# Altium PCB MainPCB.PcbDoc
Units mil, origin at the board's own origin, x right, y up, seen from the top; angles counter-clockwise.
Board outline 3740.16 x 1377.95 mil, 2 copper layers (Top Layer, Bottom Layer), stack 65.792 mil thick; 17 components, 11 nets, 49 pads, 0 vias.
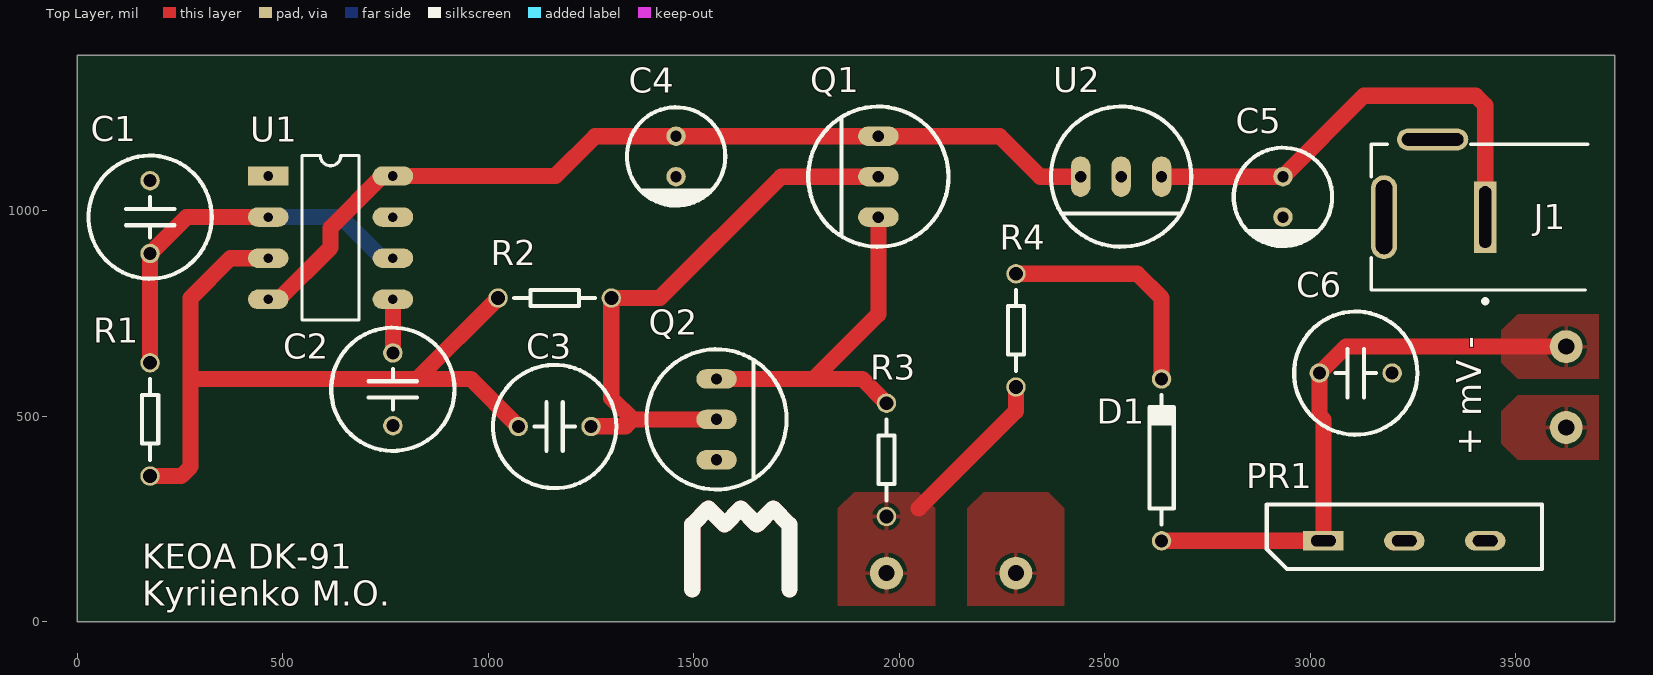
[diagram p0: Top Layer view]
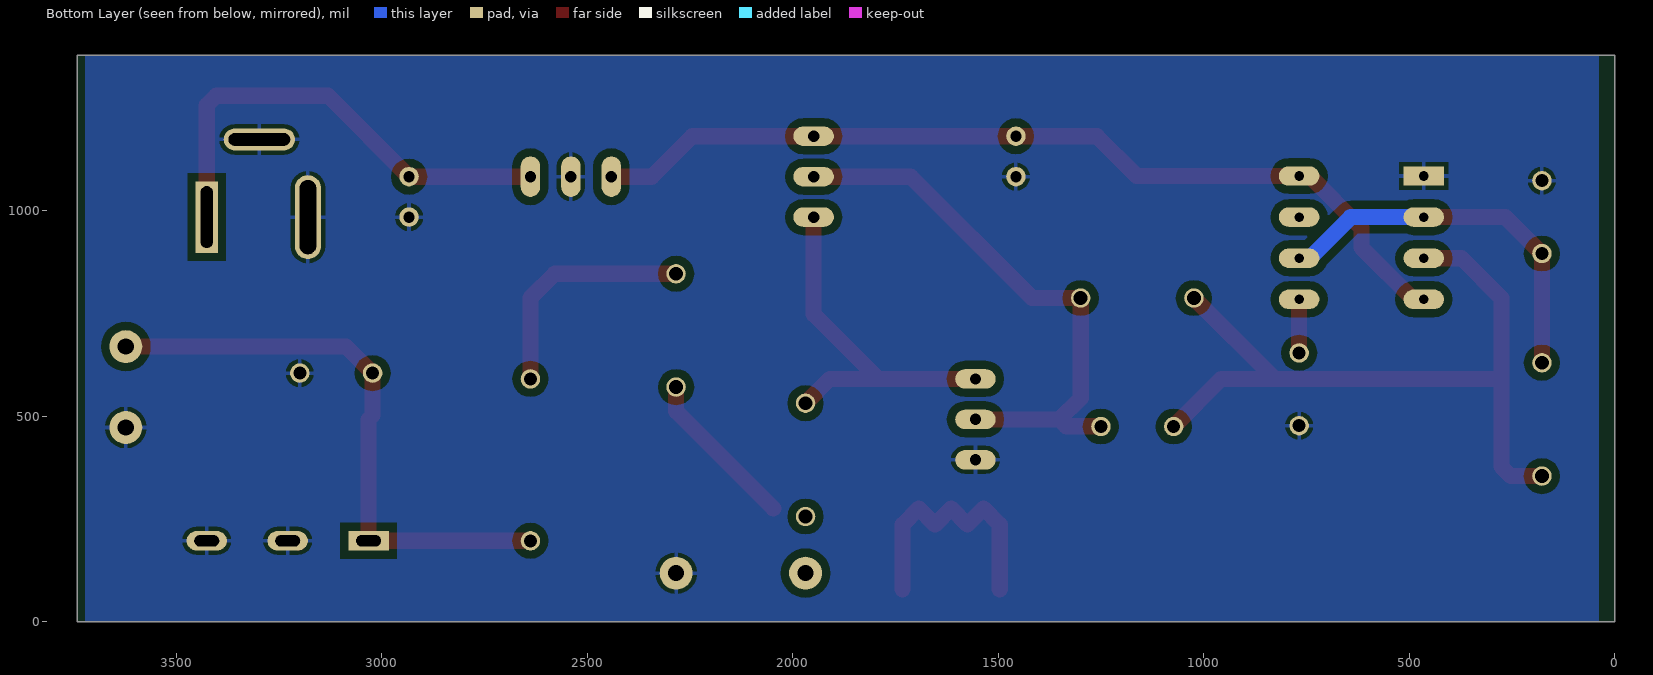
[diagram p1: Bottom Layer view, seen from below]
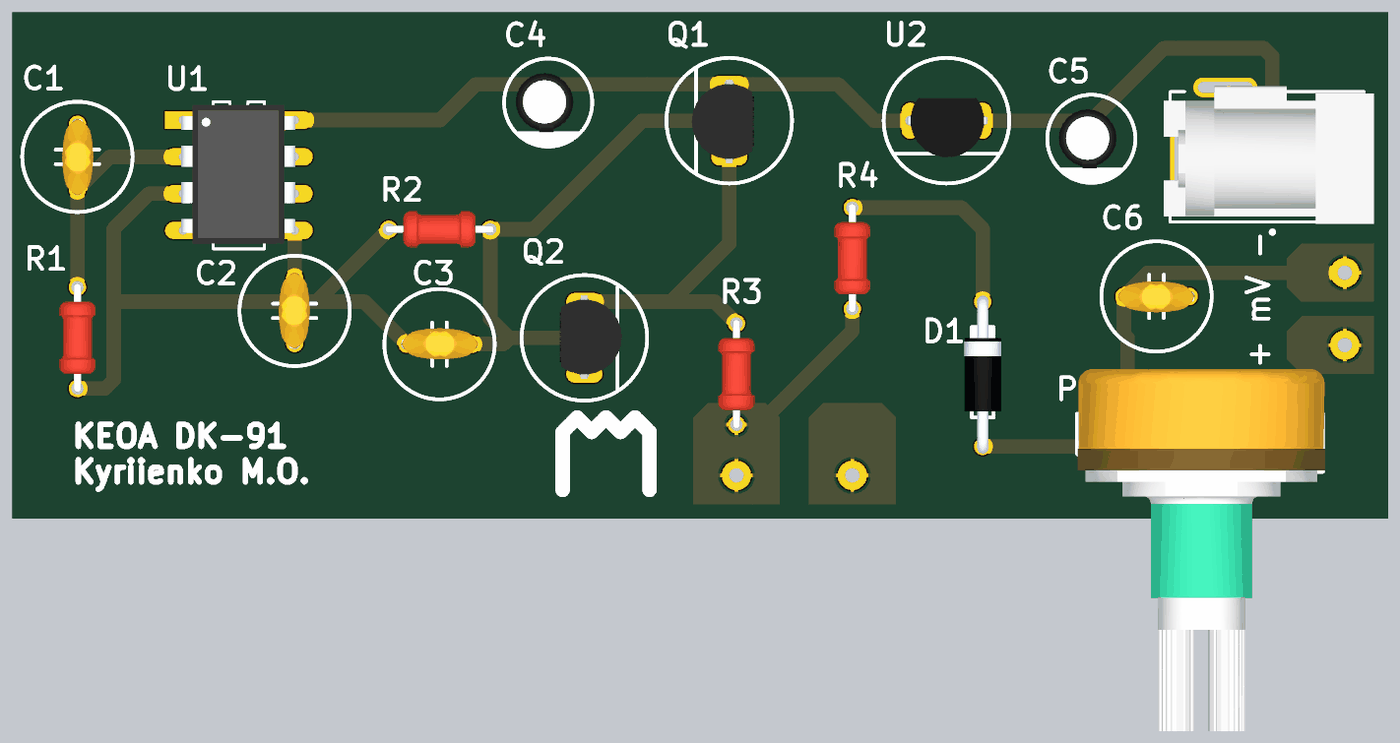
[diagram p2: 3D render of the assembled board from above, using the file's embedded part models]

## Layer stack, top to bottom
Top Solder: solder mask 0.4, Solder Resist, Dk 3.5
Top Layer: signal copper 1.4
Dielectric 1: dielectric 62.9921, FR-4, Dk 4.8
Bottom Layer: signal copper 1.4
Bottom Solder: solder mask 0.4, Solder Resist, Dk 3.5

## Board outline
0,1377.95 0,0 3740.16,0 3740.16,1377.95

## Design rules (kind name [scope] priority, off if disabled: settings)
Clearance [All] p1: gap=19.68 ignorepadtopadclearanceinfootprint=FALSE
PolygonConnect [All] p1: connectstyle=Relief reliefconductorwidth=10 reliefentries=4 polygonreliefangle="90 Angle" airgapwidth=10
RoutingVias [All] p1: holewidth=28 width=50 viastyle="Through Hole" minholewidth=28 minwidth=50 maxholewidth=28 maxwidth=50
SolderMaskExpansion [All] p1: expansion=4 istentingtop=FALSE
Width [All] p1: maxlimit=216.54 minlimit=39.37 preferedwidth=39.37
30 further rules are at their usual default settings.

## Components (designator, comment, footprint, x,y, rotation, side; value= is the part's Value field where it differs from the comment)
C1 "1nF" Ceramica 177.17,984.25 r90 top
C2 "0.01uF" Ceramica 767.72,565.39 r270 top
C3 "1nF" Ceramica 1161.42,474.84 r180 top
C4 "100uF" Electrolytic 1456.69,1131.89 r270 top
C5 "100uF" Electrolytic 2933.07,1033.46 r270 top
C6 "0.68uF" Ceramica 3110.24,604.76 r0 top
D1 "Diode" Diode 2637.8,196.85 r90 top
J1 "Conn_Switchcraft_RAPC722X_eec" Switchcraft_RAPC722X_0 3433.07,984.25 r90 top
PR1 "Pot. 47K" Portentiometr 3021.65,196.85 r0 top
Q1 "npn" TO-92 1948.82,984.25 r180 top
Q2 "pnp" TO-92 1555.12,590.55 r0 top
R1 "10K" RESISTOR 177.17,492.13 r90 top
R2 "4.7K" RESISTOR 1161.42,787.4 r180 top
R3 "300" RESISTOR 1968.5,393.7 r90 top
R4 "8.2K" RESISTOR 2283.46,708.66 r270 top
U1 "timer 555" DIP8 464.57,1084.25 r0 top
U2 "78L05" TO-92 2637.8,1082.68 r270 top

## Footprints (in the part's own frame and the unit in brackets; to place one, negate y for a bottom-side part, rotate by r counter-clockwise, add the part's x,y. Pads: shape width x height; smd on the part's side, far side on the other; paste and mask are expansions set on the pad)
Ceramica [mm]
  round 1.2 hole 0.8: 1(-2.25,0) 2(2.25,0)
  silkscreen extent -3.81,-3.81 3.81,3.8, body extent -2.64,-1.11 2.6,1.06, height 3.46
Diode [mm]
  round 1.2 hole 0.8: A(0,0) K(10,0)
  silkscreen extent 1,-0.75 9,0.75, body extent -0.51,-1.3 10.41,1.27, height 3.06
DIP8 [mm]
  rect 2.5x1.2 hole 0.6: 1(0,0)
  oval 2.5x1.2 hole 0.6: 2(0,-2.54) 3(0,-5.08) 4(0,-7.62) 5(7.7,-7.62) 6(7.7,-5.08) 7(7.7,-2.54) 8(7.7,0)
  silkscreen extent 2.08,-8.89 5.62,1.27, body extent -0.12,-8.54 7.75,1.04, height 5.87
Electrolytic [mm]
  round 1.2 hole 0.7: 1(-1.25,0) 2(1.25,0)
  silkscreen extent -3.04,-3.04 3.04,3.04, body extent -2.05,-2.25 2.05,1.75, height 7.8
Portentiometr [mm]
  rect 2.5x1.2 hole 0.7 slot 1.524 at 0 deg: 1(0.25,0)
  oval 2.5x1.2 hole 0.7 slot 1.524 at 0 deg: 2(5.25,0) 3(10.25,0)
  silkscreen extent -3.25,-1.75 13.75,2.25, body extent -3.19,-19.65 13.91,5.35, height 21.04
RESISTOR [mm]
  round 1.2 hole 0.86: 1(-3.5,0) 2(3.5,0)
  silkscreen extent -2.5,-0.5 2.5,0.5, body extent -3.75,-1.25 3.75,1.25, height 3.3
Switchcraft_RAPC722X_0 [mm]
  rect 4.41x1.36 hole 0.76 slot 3.81 at 0 deg paste-1000 mask+0: 1(0,0.2)
  oval 1.36x4.41 hole 3.81 slot 0.76 at 0 deg paste-1000 mask+0: 2(4.8,3.45)
  oval 5.18x1.62 hole 1.02 slot 4.58 at 0 deg paste-1000 mask+0: 3(0,6.45)
  silkscreen extent -5.32,-6.15 4.5,7.25, body extent -4.63,-6.79 4.88,7.71, height 11.85
TO-92 [mm]
  oval 2.5x1.2 hole 0.7: 1(0,0) 2(0,-2.5) 3(0,-5)
  silkscreen extent -4.33,-6.83 4.33,1.83, body extent -1.71,-5.34 2.59,0.46, height 12.31

## Part data
C1 C3: library part C322C102KFR5TA, "CAP CER 1000PF 1.5KV X7R RADIAL", Case/Package=Radial, Dielectric=X7R, Manufacturer=KEMET, Max Operating Temperature=125°C, Min Operating Temperature=-55°C, Package Quantity=500, Supplier Part Number 1=399-5099-ND, Tolerance=10%, Voltage Rating=1.5kV, Capacitance=1nF, Category="Ceramic Capacitors", ComponentLink1Description=https://datasheet.ciiva.com/160/f3101-goldmax-160936.pdf?src-supplier=Digi-Key, ComponentLink1URL=https://datasheet.ciiva.com/160/f3101-goldmax-160936.pdf?src-supplier=Digi-Key, Construction=RADIAL, Depth=5.08mm, Dissipation Factor=2.5%, Height=3.18mm, Height - Seated (Max)=0.26inch, Lead Diameter=0.51mm, Lead Free="Lead Free", Lead Length=7mm, Lead Pitch=5.08mm, Lead/Base Style="Formed Leads", Length=5.08mm, Manufacturer Part Number=C322C102KFR5TA, Mount="Through Hole", Packaging=Bulk, Pitch=5.08mm, Pricing 1="1=1,43000, 10=1,13200, 50=0,98160, 100=0,84940, 500=0,64176, 1000=0,56625, 2500=0,52850, 5000=0,50962 (USD)", Radiation Hardening=No, REACH SVHC="No SVHC", RoHS=Yes, RoHS Compliant=Yes, Series="Golden Max™", Stock 1=4516, Supplier 1=Digi-Key, Termination=Radial, Voltage Rating (DC)=1.5kV, Width=5.08mm
C2: library part K103K15X7RH53L2, "Cap Ceramic 0.01uF 100V X7R 10% Radial 2.5mm 125C Bulk", Capacitance=10nF, Case/Package=Dipped, Dielectric=X7R, Manufacturer="Vishay BCcomponents", Max Operating Temperature=125°C, Min Operating Temperature=-55°C, Package Quantity=5000, Supplier Part Number 1=BC5135-ND, Tolerance=10%, Voltage Rating=100V, Category="Ceramic Capacitors", ComponentLink1Description=https://datasheet.ciiva.com/5390/mkseries-205465-5390133.pdf?src-supplier=Mouser, ComponentLink1URL=https://datasheet.ciiva.com/5390/mkseries-205465-5390133.pdf?src-supplier=Mouser, ComponentLink2Description=https://datasheet.ciiva.com/7657/526146-7657413.pdf?src-supplier=Element14, ComponentLink2URL=https://datasheet.ciiva.com/7657/526146-7657413.pdf?src-supplier=Element14, ComponentLink3Description=https://datasheet.ciiva.com/16458/kseries-16458794.pdf?src-supplier=Future+Electronics, ComponentLink3URL=https://datasheet.ciiva.com/16458/kseries-16458794.pdf?src-supplier=Future+Electronics, ComponentLink4Description=https://datasheet.ciiva.com/181/49363-vmn-pt9161-181198.pdf?src-supplier=Digi-Key, ComponentLink4URL=https://datasheet.ciiva.com/181/49363-vmn-pt9161-181198.pdf?src-supplier=Digi-Key, Construction=RADIAL, Depth=2.6mm, Diameter=500um, Height=4mm, Height - Seated (Max)=0.062inch, Lead Diameter=0.5mm, Lead Free="Lead Free", Lead Length=30mm, Lead Pitch=2.5mm, Lead/Base Style=Straight, Length=4mm, Manufacturer Part Number=K103K15X7RH53L2, Mount="Through Hole", Packaging=Bulk, Pricing 1="1=0,28000, 10=0,19300, 50=0,12840, 100=0,10920, 500=0,07708, 1000=0,06745, 2500=0,06424, 5000=0,05942 (USD)", Radiation Hardening=No, REACH SVHC=Unknown, RoHS=Yes, RoHS Compliant=Yes, Series="Mono-Kap™ K", Stock 1=17755, Supplier 1=Digi-Key, Termination=Radial, Thickness=2.6mm, Voltage Rating (DC)=100V, Weight=0.005644oz, Width=2.5mm
C4 C5: library part UPJ1C101MED1TD, "Cap Aluminum Lytic 100uF 16V 20% (6.3 X 11mm) Radial 2.5mm 175mA 2000h 105C Ammo Pack", Case/Package=Radial, Manufacturer=Nichicon, Max Operating Temperature=105°C, Min Operating Temperature=-55°C, Package Quantity=2000, Ripple Current=175mA, Supplier Part Number 1=493-5010-1-ND, Tolerance=20%, Voltage Rating=16V, Capacitance=100uF, Category="Aluminum Electrolytic Capacitors", ComponentLink1Description=https://datasheet.ciiva.com/6298/e-pj-6298311.pdf?src-supplier=Digi-Key, ComponentLink1URL=https://datasheet.ciiva.com/6298/e-pj-6298311.pdf?src-supplier=Digi-Key, Diameter=10mm, Height - Seated (Max)=0.472inch, Impedance=550mR, Lead Diameter=0.5mm, Lead Pitch=0.098inch, Length=16mm, Life (Hours)=2000Hour, Manufacturer Part Number=UPJ1C101MED1TD, Mount="Through Hole", Packaging="Tape and Reel", Pricing 1="1=0,38000, 10=0,26300, 50=0,18440, 100=0,15800, 500=0,11850, 1000=0,10007 (USD)", RoHS=Yes, RoHS Compliant=Yes, Series=PJ, Stock 1=5068, Supplier 1=Digi-Key, Termination=Radial, Voltage Rating (DC)=16V
C6: library part FA24X7R1H684KRU00, "Capacitor Ceramic 0.68uF 50V X7R 10% 5mm Bulk", Manufacturer=TDK, Supplier Part Number 1=445-181142-ND, Category="Ceramic Capacitors", Manufacturer Part Number=FA24X7R1H684KRU00, Pricing 1="1=0,58000, 10=0,40800, 50=0,30860, 100=0,26880, 500=0,19910, 1000=0,16924, 2500=0,15928, 5000=0,14932 (USD)", RoHS=Yes, RoHS Compliant=Yes, Stock 1=1988, Supplier 1=Digi-Key
D1: library part 1N4148, "Diode Ultra Fast Recovery Rectifier 100 Volt 0.3A 2-Pin DO-3", Average Rectified Current=200mA, Capacitance=4pF, Case/Package=DO-35, Current=4A, Forward Current=300mA, Forward Voltage=1V, Manufacturer="ON Semiconductor / Fairchild", Max Forward Surge Current (Ifsm)=1A, Max Operating Temperature=175°C, Max Power Dissipation=500mW, Max Repetitive Reverse Voltage (Vrrm)=100V, Max Reverse Current=5uA, Min Operating Temperature=-65°C, Package Quantity=2000, Supplier Part Number 1=1N4148FS-ND, Category="Integrated Circuits (ICs)", ComponentLink1Description=https://datasheet.ciiva.com/27049/743285-27049708.pdf?src-supplier=Jameco, ComponentLink1URL=https://datasheet.ciiva.com/27049/743285-27049708.pdf?src-supplier=Jameco, ComponentLink2Description=https://datasheet.ciiva.com/1242/1716967-1242233.pdf?src-supplier=Newark, ComponentLink2URL=https://datasheet.ciiva.com/1242/1716967-1242233.pdf?src-supplier=Newark, ComponentLink3Description=https://datasheet.ciiva.com/910/1n914-910546.pdf?src-supplier=Digi-Key, ComponentLink3URL=https://datasheet.ciiva.com/910/1n914-910546.pdf?src-supplier=Digi-Key, ComponentLink4Description=https://datasheet.ciiva.com/3304/fdll914b-3304217.pdf?src-supplier=Avnet, ComponentLink4URL=https://datasheet.ciiva.com/3304/fdll914b-3304217.pdf?src-supplier=Avnet, ComponentLink5Description=https://datasheet.ciiva.com/25951/fdll914b-25951516.pdf?src-supplier=Avnet+Europe, ComponentLink5URL=https://datasheet.ciiva.com/25951/fdll914b-25951516.pdf?src-supplier=Avnet+Europe, Contact Plating=Tin,Matte, Current Rating=200mA, Diameter=1.91mm, Element Configuration=Single, Height=4.56mm, Lead Free="Lead Free", Length=4.56mm, Manufacturer Part Number=1N4148, Max Reverse Voltage (DC)=100V, Max Surge Current=4A, Mount="Through Hole", Number of Pins=2, Output Current=200mA, Outside Diameter=1.85mm, Packaging=Bulk, Peak Non-Repetitive Surge Current=4A, Polarity=Standard, Power Dissipation=500mW, Pricing 1="1=0,10000, 10=0,07100, 100=0,03870, 500=0,02378, 1000=0,01622, 2000=0,01379, 5000=0,01243, 10000=0,01081, 50000=0,00893 (USD)", Radiation Hardening=No, REACH SVHC="No SVHC", Recovery Time=4ns, Reverse Recovery Time=4ns, Reverse Voltage=100V, RoHS=Yes, Series=-, Stock 1=430087, Supplier 1=Digi-Key, Voltage=100V, Voltage Rating (DC)=100V, Weight=0.01lb, Width=1.91mm
J1: "CONN PWR JACK 2X5.5MM SOLDER", color=Black, current_rating="5 A", Digikey Part Number=SC1313-ND, Manufacturer=Switchcraft, Mouser Part Number=502-RAPC722X, Octopart Part Number=da391331d91005fe, Package=cCONN_PTH_DC_JACK_14MM5_9MM0, Part Number=RAPC722X, Temperature=to, voltage_rating_ac="250 V", Category 001Fcd153521Dbd8="Jack Plugs/Sockets", Category 75Fab8F04590Ae3D="Connectors and Adapters", Category 0836C53C3D42D3F1=Connectors, Category A3C16Ecb93907806=Uncategorized, Category Bda670Ac885E6661=Uncategorized, ComponentLink1Description=Upverter, ComponentLink1URL=https://upverter.com/upn/revision/3390e98938df1595/, ComponentLink2Description=Datasheet, ComponentLink2URL=https://upverter.com/datasheet/96e949921d5d9c87f4f03f75a44e5e613c467149.pdf, Digikey Description="CONN PWR JACK 2X5.5MM SOLDER", gender=Female, helpURL=https://upverter.com/upn/revision/3390e98938df1595/, Lead Free=yes, Mounting Type="through hole", mounting_angle="90 °", Num Pins=3, number_of_contacts=2, Price=0.740243901321, RoHS=TRUE, Supplier 1=Digi-Key, Supplier 2=Mouser, Supplier Part Number 1=SC1313-ND, Supplier Part Number 2=502-RAPC722X
PR1: library part 23ESA473KMF16N, "Potentiometers 23E 47KA 10% 6.35X16FL B8", Manufacturer="TE Connectivity", Max Operating Temperature=70°C, Max Power Dissipation=400mW, Min Operating Temperature=-25°C, Package Quantity=200, Resistance=47kR, Resistance Tolerance=10%, Resistor Type=Carbon, Supplier Part Number 1=95W9495, Voltage Rating=500V, Category="Variable Resistors and Potentiometers", ComponentLink1Description=https://datasheet.ciiva.com/12918/ng-ds-1773115-e-199807-12918317.pdf?src-supplier=Mouser, ComponentLink1URL=https://datasheet.ciiva.com/12918/ng-ds-1773115-e-199807-12918317.pdf?src-supplier=Mouser, ComponentLink2Description=https://datasheet.ciiva.com/22658/1468316-22658904.pdf?src-supplier=Element14, ComponentLink2URL=https://datasheet.ciiva.com/22658/1468316-22658904.pdf?src-supplier=Element14, ELV=Compliant, Length=26.7mm, Manufacturer Part Number=23ESA473KMF16N, Mount=Panel, Number of Gangs=1, Number of Turns=1, Packaging=Bulk, Power Rating=400mW, Pricing 1="1=0,80700, 10=0,80700, 25=0,80700, 50=0,80700, 100=0,80700, 250=0,80700 (USD)", REACH SVHC="No SVHC", RoHS=Yes, RoHS Compliant=Yes, Sealable="No (Without)", Series="23, Citec", Stock 1=3, Supplier 1=Newark, Taper=Linear, Termination=Eyelet, Tolerance=10%, Type=Potentiometer, Voltage Rating (DC)=500V
Q1: library part BC547B, "ON SEMICONDUCTOR - BC547B - Bipolar (BJT) Single Transistor, General Purpose, NPN, 45 V, 300 MHz, 500 mW, 100 mA, 110 hFE", Case/Package=TO-92, Collector Base Voltage (VCBO)=50V, Collector Emitter Breakdown Voltage=45V, Collector Emitter Saturation Voltage=300mV, Current Rating=100mA, Emitter Base Voltage (VEBO)=6V, Frequency=300MHz, Manufacturer="ON Semiconductor / Fairchild", Max Operating Temperature=150°C, Max Power Dissipation=500mW, Min Operating Temperature=-65°C, Package Quantity=2000, Supplier Part Number 1=67K3328, Voltage=40V, Category=BJTs, Collector Emitter Voltage (VCEO)=45V, ComponentLink1Description=https://datasheet.ciiva.com/17011/bc547-17011404.pdf?src-supplier=Future+Electronics, ComponentLink1URL=https://datasheet.ciiva.com/17011/bc547-17011404.pdf?src-supplier=Future+Electronics, ComponentLink2Description=https://datasheet.ciiva.com/985/bc546-547-548rev5-985523.pdf?src-supplier=Digi-Key, ComponentLink2URL=https://datasheet.ciiva.com/985/bc546-547-548rev5-985523.pdf?src-supplier=Digi-Key, ComponentLink3Description=https://datasheet.ciiva.com/972/bc546-972262.pdf?src-supplier=Digi-Key, ComponentLink3URL=https://datasheet.ciiva.com/972/bc546-972262.pdf?src-supplier=Digi-Key, ComponentLink4Description=https://datasheet.ciiva.com/1195/1868820-1195464.pdf?src-supplier=Element14, ComponentLink4URL=https://datasheet.ciiva.com/1195/1868820-1195464.pdf?src-supplier=Element14, ComponentLink5Description=https://datasheet.ciiva.com/25996/bc550-25996616.pdf?src-supplier=Avnet+Europe, ComponentLink5URL=https://datasheet.ciiva.com/25996/bc550-25996616.pdf?src-supplier=Avnet+Europe, ComponentLink6Description=https://datasheet.ciiva.com/11197/bc550-11197769.pdf?src-supplier=Avnet, ComponentLink6URL=https://datasheet.ciiva.com/11197/bc550-11197769.pdf?src-supplier=Avnet, ComponentLink7Description=https://datasheet.ciiva.com/16472/bc550-16472201.pdf?src-supplier=Avnet+Asia, ComponentLink7URL=https://datasheet.ciiva.com/16472/bc550-16472201.pdf?src-supplier=Avnet+Asia, Contact Plating=Copper,Tin,Silver, Element Configuration=Single, Gain Bandwidth Product=100MHz, Height=4.58mm, hFE Min=200, Lead Free="Lead Free", Length=4.58mm, Manufacturer Part Number=BC547B, Max Breakdown Voltage=45V, Max Collector Current=100mA, Max Frequency=300MHz, Mount="Through Hole", Number of Elements=1, Number of Pins=3, Packaging=Bulk, Polarity=NPN, Power Dissipation=500mW, Pricing 1="1=0,43300, 10=0,30500, 100=0,15600, 500=0,12700, 1000=0,09600, 2500=0,08100 (USD)", Radiation Hardening=No, REACH SVHC="No SVHC", RoHS=Yes, Stock 1=1781, Supplier 1=Newark, Transition Frequency=300MHz, Voltage Rating (DC)=45V, Weight=0.007055oz, Width=3.86mm
Q2: library part KSA539YTA, "TRANS PNP 45V 0.2A TO-92", Case/Package=TO-92-3, Collector Base Voltage (VCBO)=-60V, Collector Emitter Breakdown Voltage=45V, Collector Emitter Saturation Voltage=-250mV, Current Rating=-200mA, Emitter Base Voltage (VEBO)=-5V, Manufacturer="ON Semiconductor / Fairchild", Max Collector Current=200mA, Max Operating Temperature=150°C, Max Power Dissipation=400mW, Min Operating Temperature=-55°C, Package Quantity=2000, Supplier Part Number 1=512-KSA539YTA, Voltage Rating (DC)=-45V, Category=BJTs, Collector Emitter Voltage (VCEO)=45V, ComponentLink1Description=https://datasheet.ciiva.com/4724/ksa539-88760-4724359.pdf?src-supplier=Mouser, ComponentLink1URL=https://datasheet.ciiva.com/4724/ksa539-88760-4724359.pdf?src-supplier=Mouser, ComponentLink2Description=https://datasheet.ciiva.com/982/ksa539-982951.pdf?src-supplier=Digi-Key, ComponentLink2URL=https://datasheet.ciiva.com/982/ksa539-982951.pdf?src-supplier=Digi-Key, Element Configuration=Single, hFE Min=40, Lead Free="Lead Free", Manufacturer Part Number=KSA539YTA, Mount="Through Hole", Number of Elements=1, Number of Pins=3, Packaging="Ammo Pack", Polarity=PNP, Power Dissipation=400mW, Radiation Hardening=No, RoHS=Yes, Supplier 1=Mouser, Weight=0.1782g
R1: library part CFR100J10K, "Carbon Film Resistors - Through Hole 10KOhm 1W 500PPM", Case/Package=Axial, Manufacturer="TE Connectivity", Max Operating Temperature=155°C, Max Power Dissipation=1W, Min Operating Temperature=-55°C, Number of Resistors=1, Resistance=10kR, Resistance Tolerance=5%, Resistor Type="Thin Film", Supplier Part Number 1=A105978CT-ND, Temperature Coefficient=0ppm/°C, Voltage Rating=500V, Category="Through-Hole Resistors", ComponentLink1Description=https://datasheet.ciiva.com/11826/0900766b80098b49-11826112.pdf?src-supplier=RSComponents, ComponentLink1URL=https://datasheet.ciiva.com/11826/0900766b80098b49-11826112.pdf?src-supplier=RSComponents, ComponentLink2Description=https://datasheet.ciiva.com/24355/eng-ds-1773195-d-24355942.pdf?src-supplier=Onlinecomponents.com, ComponentLink2URL=https://datasheet.ciiva.com/24355/eng-ds-1773195-d-24355942.pdf?src-supplier=Onlinecomponents.com, ComponentLink3Description=https://datasheet.ciiva.com/16760/70063023-16760748.pdf?src-supplier=Allied+Electronics, ComponentLink3URL=https://datasheet.ciiva.com/16760/70063023-16760748.pdf?src-supplier=Allied+Electronics, ComponentLink4Description=https://datasheet.ciiva.com/22664/1723854-22664894.pdf?src-supplier=Element14, ComponentLink4URL=https://datasheet.ciiva.com/22664/1723854-22664894.pdf?src-supplier=Element14, Diameter=5mm, ELV=Compliant, Length=12mm, Manufacturer Part Number=CFR100J10K, Mount=Axial, Number of Terminations=2, Packaging="Cut Tape", Power Rating=1W, Pricing 1="1=0,29000, 10=0,24100, 25=0,17560, 50=0,12740, 100=0,09440, 250=0,07244, 500=0,05708 (USD)", REACH SVHC="No SVHC", RoHS=Yes, RoHS Compliant=Yes, Series="CFR100, Neohm", Stock 1=792, Supplier 1=Digi-Key, Technology="CARBON FILM", Termination=Axial, Tolerance=5%, Voltage Rating (DC)=500V
R2: library part CFS1/4CT52R472J, "Res Carbon Film 4.7K Ohm 5% 0.25W(1/4W) -450ppm/C to 350ppm/C Conformal Coated AXL T/R", Case/Package=Conformal, Manufacturer="KOA Speer", Max Operating Temperature=155°C, Min Operating Temperature=-55°C, Package Quantity=5000, Power Rating=250mW, Resistance=4.7kR, Resistor Type="Carbon Film", Supplier Part Number 1=2019-CFS1/4CT52R472JCT-ND, Temperature Coefficient=350ppm/°C, Tolerance=5%, Voltage Rating=250V, Category="Through-Hole Resistors", ComponentLink1Description=https://datasheet.ciiva.com/5478/cf-5478494.pdf?src-supplier=Mouser, ComponentLink1URL=https://datasheet.ciiva.com/5478/cf-5478494.pdf?src-supplier=Mouser, Construction=Cylindrical, Length=3.2mm, Manufacturer Part Number=CFS1/4CT52R472J, Military Standard=Not, Mount="Through Hole", Packaging="Tape and Reel", Pricing 1="1=0,10000, 10=0,04600, 25=0,03360, 50=0,02560, 100=0,01890, 250=0,01440, 500=0,01152, 1000=0,00848 (USD)", RoHS=Yes, Series=CF, Stock 1=3871, Supplier 1=Digi-Key, Termination=Axial
R3: library part RSF100JB-73-300R, "RES 300 OHM 1W 5% AXIAL", Case/Package=Axial, Manufacturer=Yageo, Max Operating Temperature=235°C, Max Power Dissipation=1W, Min Operating Temperature=-55°C, Package Quantity=100, Resistance=300R, Resistor Type="Metal Oxide", Supplier Part Number 1=300W-1-ND, Tolerance=5%, Category="Through-Hole Resistors", ComponentLink1Description=https://datasheet.ciiva.com/2714/yageolr-rsf-2013-2714971.pdf?src-supplier=Digi-Key, ComponentLink1URL=https://datasheet.ciiva.com/2714/yageolr-rsf-2013-2714971.pdf?src-supplier=Digi-Key, Features="Flame Retardant Coating", Length=0.453inch, Manufacturer Part Number=RSF100JB-73-300R, Number of Terminations=2, Packaging=Bulk, Pricing 1="1=0,31000, 10=0,26500, 25=0,19240, 50=0,13940, 100=0,10340, 250=0,07936, 500=0,06252, 1000=0,04329, 5000=0,03608 (USD)", RoHS=Yes, Stock 1=1681, Supplier 1=Digi-Key
R4: library part CF14JA8K20, "RES 8.2K OHM 1/4W 5% AXIAL", Case/Package=Axial, Manufacturer="Stackpole Electronics", Max Operating Temperature=155°C, Max Power Dissipation=250mW, Min Operating Temperature=-55°C, Package Quantity=5000, Resistance=8.2kR, Resistor Type="Carbon Film", Temperature Coefficient=-400ppm/°C, Tolerance=5%, Category="Through-Hole Resistors", ComponentLink1Description=https://www.seielect.com/Catalog/SEI-CF_CFM.pdf?src-supplier=Digi-Key, ComponentLink1URL=https://www.seielect.com/Catalog/SEI-CF_CFM.pdf?src-supplier=Digi-Key, ComponentLink2Description=https://www.seielect.com/catalog/SEI-CF_CFM.pdf?src-supplier=Avnet, ComponentLink2URL=https://www.seielect.com/catalog/SEI-CF_CFM.pdf?src-supplier=Avnet, Contact Plating=Tin,Matte, Diameter=2.3mm, Features="Flame Retardant Coating", Length=0.256inch, Manufacturer Part Number=CF14JA8K20, Mount="Through Hole,Axial", Number of Terminations=2, Packaging="Tape and Reel", Pricing 1="5000=0,00469, 10000=0,00462, 20000=0,00449, 30000=0,00439, 40000=0,00422, 50000=0,00413, 500000=0,00403 (USD)", Radiation Hardening=No, RoHS=Yes, RoHS Compliant=Yes, Series=CF, Supplier 1=Avnet, Supplier Part Number 1=CF14JA8K20
U1: library part NE555P, "Standard Timer Single 8-Pin PDIP Tube", Case/Package=PDIP, Current Rating=10mA, Frequency=500kHz, High Level Output Current=-200mA, Low Level Output Current=200mA, Manufacturer="Texas Instruments", Max Operating Temperature=70°C, Max Supply Voltage=16V, Min Operating Temperature=0°C, Min Supply Voltage=4.5V, Nominal Supply Current=2mA, Operating Supply Voltage=5V, Package Quantity=50, Quiescent Current=15mA, Supplier Part Number 1=595-NE555P, Category="Clock and Timing", ComponentLink1Description=https://datasheet.ciiva.com/1139/sa555-1139904.pdf?src-supplier=Element14, ComponentLink1URL=https://datasheet.ciiva.com/1139/sa555-1139904.pdf?src-supplier=Element14, ComponentLink2Description=https://datasheet.ciiva.com/19457/904085-19457361.pdf?src-supplier=Jameco, ComponentLink2URL=https://datasheet.ciiva.com/19457/904085-19457361.pdf?src-supplier=Jameco, ComponentLink3Description=https://datasheet.ciiva.com/26325/152184-da-01-en-ne555p-timer-tid-26325915.pdf?src-supplier=Conrad, ComponentLink3URL=https://datasheet.ciiva.com/26325/152184-da-01-en-ne555p-timer-tid-26325915.pdf?src-supplier=Conrad, ComponentLink4Description=https://datasheet.ciiva.com/1147/1764032-1147750.pdf?src-supplier=Newark, ComponentLink4URL=https://datasheet.ciiva.com/1147/1764032-1147750.pdf?src-supplier=Newark, ComponentLink5Description=https://datasheet.ciiva.com/14094/ne555-series-eng-tds-14094950.pdf?src-supplier=Distrelec, ComponentLink5URL=https://datasheet.ciiva.com/14094/ne555-series-eng-tds-14094950.pdf?src-supplier=Distrelec, ComponentLink6Description=https://datasheet.ciiva.com/14274/ne555-14274456.pdf?src-supplier=Avnet, ComponentLink6URL=https://datasheet.ciiva.com/14274/ne555-14274456.pdf?src-supplier=Avnet, ComponentLink7Description=https://datasheet.ciiva.com/15152/getdatasheetpartid-248510-15152620.pdf?src-supplier=Verical, ComponentLink7URL=https://datasheet.ciiva.com/15152/getdatasheetpartid-248510-15152620.pdf?src-supplier=Verical, ComponentLink8Description=https://datasheet.ciiva.com/1233/ne555-1233454.pdf?src-supplier=Digi-Key, ComponentLink8URL=https://datasheet.ciiva.com/1233/ne555-1233454.pdf?src-supplier=Digi-Key, ComponentLink9Description=https://datasheet.ciiva.com/26228/ne555-26228892.pdf?src-supplier=Avnet+Europe, ComponentLink9URL=https://datasheet.ciiva.com/26228/ne555-26228892.pdf?src-supplier=Avnet+Europe, Contact Plating=Gold, Height=4.57mm, Lead Free="Lead Free", Length=9.81mm, Manufacturer Part Number=NE555P, Mount="Through Hole", Number of Pins=8, Number of Timers/Counters=1, Operating Supply Current=10mA, Packaging=Rail/Tube, Pricing 1="1=0,41000, 10=0,32900, 50=0,32900, 100=0,32900, 1000=0,32900, 10000=0,32900 (USD)", Radiation Hardening=No, REACH SVHC="No SVHC", RoHS=Yes, RoHS Compliant=Yes, Stock 1=16580, Supplier 1=Mouser, Weight=0.015535oz, Width=6.35mm
U2: library part L78L05ACZ, "Standard Regulator Pos 5V 0.1A 3-Pin TO-92 Bag", Case/Package=TO-92, Dropout Voltage=1.7V, Manufacturer=STMicroelectronics, Max Input Voltage=30V, Max Operating Temperature=125°C, Max Output Current=100mA, Min Input Voltage=7V, Min Operating Temperature=0°C, Min Output Voltage=5V, Output Voltage Accuracy=4%, Package Quantity=2500, Power Supply Rejection Ratio (PSRR)=49dB, Quiescent Current=6mA, Supplier Part Number 1=497-2952-ND, Tolerance=10%, Accuracy=5%, Category="Voltage Regulators - Linear", ComponentLink1Description=https://datasheet.ciiva.com/15110/getdatasheetpartid-34813-15110912.pdf?src-supplier=Verical, ComponentLink1URL=https://datasheet.ciiva.com/15110/getdatasheetpartid-34813-15110912.pdf?src-supplier=Verical, ComponentLink2Description=https://datasheet.ciiva.com/26347/47-3278e-26347723.pdf?src-supplier=Rapid+Electronics, ComponentLink2URL=https://datasheet.ciiva.com/26347/47-3278e-26347723.pdf?src-supplier=Rapid+Electronics, ComponentLink3Description=https://datasheet.ciiva.com/19480/889428-19480893.pdf?src-supplier=Jameco, ComponentLink3URL=https://datasheet.ciiva.com/19480/889428-19480893.pdf?src-supplier=Jameco, ComponentLink4Description=https://datasheet.ciiva.com/26904/l78l05acz-26904499.pdf?src-supplier=IIIC, ComponentLink4URL=https://datasheet.ciiva.com/26904/l78l05acz-26904499.pdf?src-supplier=IIIC, ComponentLink5Description=https://datasheet.ciiva.com/29156/156059-da-01-en-spannungsregler-l78l05acz-to92-stm-29156936.pdf?src-supplier=Conrad, ComponentLink5URL=https://datasheet.ciiva.com/29156/156059-da-01-en-spannungsregler-l78l05acz-to92-stm-29156936.pdf?src-supplier=Conrad, ComponentLink6Description=https://datasheet.ciiva.com/1511/1868798-1511941.pdf?src-supplier=Element14, ComponentLink6URL=https://datasheet.ciiva.com/1511/1868798-1511941.pdf?src-supplier=Element14, ComponentLink7Description=https://datasheet.ciiva.com/3223/cd00000446-3223430.pdf?src-supplier=Avnet, ComponentLink7URL=https://datasheet.ciiva.com/3223/cd00000446-3223430.pdf?src-supplier=Avnet, ComponentLink8Description=https://datasheet.ciiva.com/29570/cd00000446-29570390.pdf?src-supplier=Digi-Key, ComponentLink8URL=https://datasheet.ciiva.com/29570/cd00000446-29570390.pdf?src-supplier=Digi-Key, ComponentLink9Description=https://datasheet.ciiva.com/4882/cd00000446-355303-4882380.pdf?src-supplier=Mouser, ComponentLink9URL=https://datasheet.ciiva.com/4882/cd00000446-355303-4882380.pdf?src-supplier=Mouser, ComponentLink10Description=https://datasheet.ciiva.com/18404/70013906-18404044.pdf?src-supplier=Allied+Electronics, ComponentLink10URL=https://datasheet.ciiva.com/18404/70013906-18404044.pdf?src-supplier=Allied+Electronics, ComponentLink11Description=https://datasheet.ciiva.com/14111/szl78l-data-en-14111405.pdf?src-supplier=Distrelec, ComponentLink11URL=https://datasheet.ciiva.com/14111/szl78l-data-en-14111405.pdf?src-supplier=Distrelec, Contact Plating=Tin,Matte, Height=4.95mm, Lead Free="Lead Free", Length=4.95mm, Manufacturer Part Number=L78L05ACZ, Mount="Through Hole", Nominal Output Voltage=5V, Number of Outputs=1, Number of Pins=3, Number of Regulators=1, Output Configuration=Positive, Output Current=100mA, Output Type=Fixed,Adjustable, Output Voltage=5V, Packaging=Bag, Polarity=Positive, Pricing 1="1=0,50000, 10=0,40900, 25=0,37360, 100=0,27810, 250=0,25208, 500=0,20860, 1000=0,15646, 2500=0,14350 (USD)", Radiation Hardening=No, REACH SVHC="No SVHC", RoHS=Yes, RoHS Compliant=Yes, Series=-, Stock 1=7, Supplier 1=Digi-Key, Weight=0.016oz, Width=3.94mm

## Free pads (board coordinates)
  round 80 hole 39.37: 2(1968.5,118.11) 5(2283.46,118.11) 6(3622.05,669.29) 7(3622.05,472.44)

## Nets (pads, with @x,y where several pads share a name; then routed paths per layer and width w, separated by ;. In a path a pad name is that pad's centre, name@x,y a point inside that pad or via, vN(x,y) a via of type N, cw(c..) or ccw(c..) an arc to the next point about the centre after c; other vN are vias at no path point)
GND: C1.2 C2.2 C4.2 C5.2 C6.2 J1.2 J1.3 pad.5 pad.7 PR1.2 PR1.3 Q2.3 U1.1 U2.2 | length 5.1
  Top Layer w39.37: PR1.2@3201.25,193.21 PR1.2@3204.89,196.85
NetC1_1: C1.1 R1.2 U1.2 U1.6 | length 934.4
  Top Layer w39.37: R1.2 C1.1 265.75,984.25 U1.2
  Bottom Layer w39.37: U1.2 642.13,984.25 742.13,884.25 U1.6
NetC2_1: C2.1 U1.5 | length 130.3
  Top Layer w39.37: C2.1 U1.5
NetC3_1: C3.1 Q1.2 Q2.2 R2.1 | length 1401
  Top Layer w39.37: C3.1 1250.61,475.45 1334.4,475.45 1351.08,492.13 ; Q2.2 1351.08,492.13 ; Q1.2 1712.6,1082.68 1417.32,787.4 R2.1 1299.21,543.99 1351.08,492.13
NetC3_2: C3.2 R1.1 R2.2 U1.3 | length 1870.6
  Top Layer w39.37: R1.1 252.53,354.33 275.59,377.39 275.59,590.55 ; U1.3 372.44,884.25 275.59,787.4 275.59,590.55 ; R2.2 826.77,590.55 ; C3.2 957.12,590.55 826.77,590.55 ; 275.59,590.55 826.77,590.55
NetC4_1: C4.1 Q1.3 U1.4 U1.8 U2.3 | length 2209.7
  Top Layer w39.37: U1.4 490.16,784.25 616.14,910.24 616.14,958.27 742.13,1084.25 U1.8 1162.99,1084.25 1259.84,1181.1 C4.1 Q1.3 2244.09,1181.1 2342.52,1082.68 U2.3
NetC6_1: C6.1 D1.A pad.6 PR1.1 | length 1432.8
  Top Layer w39.37: D1.A PR1.1 3031.5,492.13 3021.65,501.97 C6.1 3086.19,669.29 pad.6
NetD1_2: D1.K R4.1 | length 575.6
  Top Layer w39.37: R4.1 2578.74,846.46 2637.8,787.4 D1.K
NetQ1_1: Q1.1 Q2.1 R3.2 | length 896.8
  Top Layer w39.37: Q2.1 1791.34,590.55 ; Q1.1 1948.82,748.03 1791.34,590.55 ; R3.2 1909.45,590.55 1791.34,590.55
NetR3_1: pad.2 R3.1 R4.2 | length 393.1
  Top Layer w39.37: 2047.24,275.59 2283.46,511.81 R4.2
VCC: C5.1 J1.1 U2.1 | length 1150.7
  Top Layer w39.37: U2.1 C5.1 3129.92,1279.53 3402.13,1279.53 3425.2,1256.47 J1.1
pads on no net: U1.7
copper on no net: | length 649
  Top Layer w39.37: 1496.06,78.74 1496.06,236.22 1535.43,275.59 1574.8,236.22 1614.17,275.59 1653.54,236.22 1692.91,275.59 1732.28,236.22 1732.28,78.74

## Polygon pours and split planes (outlines as drawn)
GND on Top Layer "GND_L01_P010" (solid, remove dead copper, pour order 10): 3700.79,551.18 3700.79,393.7 3503.94,393.7 3464.57,433.07 3464.57,511.81 3503.94,551.18
NetC6_1 on Top Layer "NETC6_1_L01_P005" (solid, remove dead copper, pour order 5): 3700.79,748.03 3700.79,590.55 3503.94,590.55 3464.57,629.92 3464.57,708.66 3503.94,748.03
GND on Top Layer "GND_L01_P002" (solid, remove dead copper, pour order 2): 2165.35,39.37 2401.57,39.37 2401.57,275.59 2362.2,314.96 2204.72,314.96 2165.35,275.59
NetR3_1 on Top Layer "NETR3_1_L01_P001" (solid, remove dead copper, pour order 1): 1850.39,39.37 2086.61,39.37 2086.61,275.59 2047.24,314.96 1889.76,314.96 1850.39,275.59
GND on Bottom Layer "GND_L02_P009" (solid, remove dead copper, pour order 9): 3720.47,1377.95 39.37,1377.95 39.37,0 3720.47,0

## Silkscreen, mask and mechanical layers (free items; w line width, h text height)
Top Overlay:
  lines w39.37: 1496.06,78.74 1496.06,236.22 1535.43,275.59 1574.8,236.22 1614.17,275.59 ; 1732.28,78.74 1732.28,236.22 1692.91,275.59 1653.54,236.22 1614.17,275.59 ; 1614.17,275.59 1614.17,275.59
  text "+ mV -" at 3415.2,403.7 h60 r90
  text "KEOA DK-91 / Kyriienko M.O." at 157.48,39.37 h60